# EAGLE board AES_HWR1_M2018 (EAGLE 8.6.1), part 1 of 2
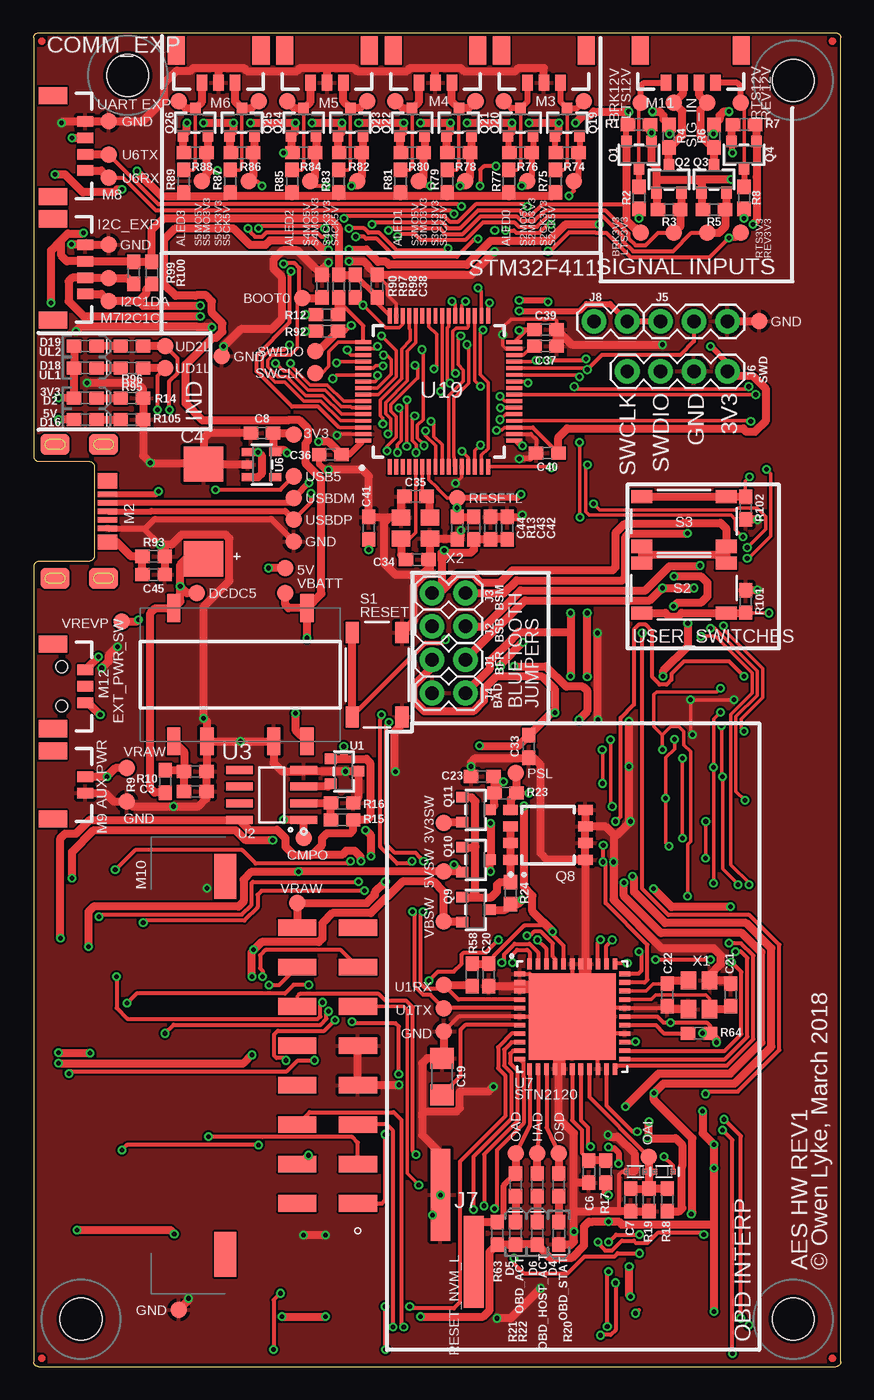
[diagram p0: board, top side]
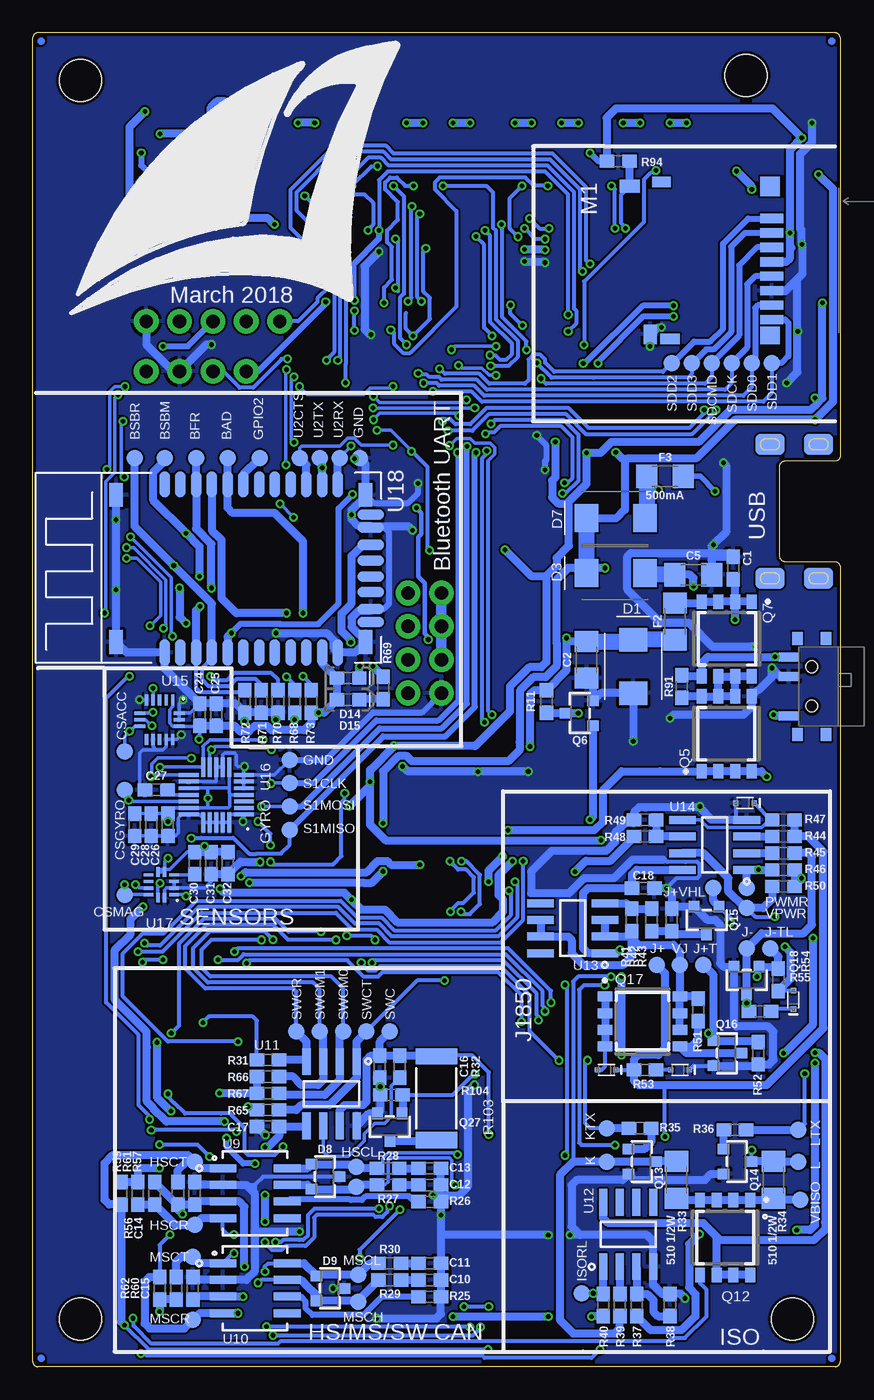
[diagram p1: board, bottom side, seen from below]

Size 61.47 x 101.6 mm. Coordinates in mm from the lower left corner, seen from the top.
Outline: 0.38,0 61.09,0 arc90 61.47,0.38 61.47,101.22 arc90 61.09,101.6 0.38,101.6 arc90 0,101.22 0,69.37 arc90 0.41,68.96 4.2,68.96 arc-90 4.63,68.56 4.63,61.77 arc-90 4.17,61.34 0.44,61.34 arc90 0,60.9 0,0.38 arc90 0.38,0
Copper layers (1*16): Top 0.035mm / dielectric 1.5mm / Bottom 0.035mm
Design rules "SeeedStudio_2layer_DRU_no_angle_20140221": minimum track width 6mil, minimum drill 12mil, track to track 6mil, track to pad 6mil, pad to pad 6mil, via to via 6mil, smd to smd 0mil, copper to edge 10mil, drill to drill 10mil, minimum pad ring 10mil, minimum via ring 6mil, stop-mask expansion 2mil, vias tented up to drill 100mil, thermal gap 10mil
Holes 3.2 mm at 3.62,3.62 57.85,3.62 57.85,97.98 7.17,98.36

## Footprints (pad centres in the part's own frame; a part is rotated, then mirrored left to right if it is on the bottom)
0603 = smd 1.1 x 1: 1 -0.85,0; 2 0.85,0
1206 = smd 1.6 x 1.8: 1 -1.4,0; 2 1.4,0
2917_P = smd 2.7 x 3: PIN_1_- -3.6,0; PIN_2_+ 3.6,0
DO-214AA = smd 1.778 x 2.159: A 2.032,0; C -2.032,0
0603-POLAR = smd 1.1 x 1: + -0.85,0; - 0.85,0
DO-214BA = smd 1.778 x 2.159: A 2.286,0; C -2.159,0
SOT23-3 = smd 0.8 x 0.9: 1 -0.95,-1; 2 0.95,-1; 3 0,1.1
SOD-523 = smd 0.4 x 0.4: A -0.7,0; C 0.7,0
1X02 = drill 1.016 pad 1.88: 1 0,0; 2 2.54,0
1X03 = drill 1.016 pad 1.88: 1 0,0; 2 2.54,0; 3 5.08,0
1X04 = drill 1.016 pad 1.88: 1 0,0; 2 2.54,0; 3 5.08,0; 4 7.62,0
SMD_HEADER_0.1IN_2POS = smd 1.5 x 7: P$1 -1.27,2.54; P$2 1.27,-2.54
SD_AMPHENOL_PUSH_PULL = smd 1.45 x 1: CD_SW1 -1.125,8.35 | smd 1 x 1.55: CD_SW2 10.15,9.925 | smd 1.3 x 1.5: NC_MOUNT1 -1.2,-0.75 | smd 1.5 x 1.5: NC_MOUNT2 10.15,-0.75 | smd 0.8 x 1.5: NC_MOUNT3 -1.475,6.85 | smd 0.8 x 1.4: NC_MOUNT4 10.475,7.5 | smd 0.7 x 1.75: P$1 7.7,-0.875; P$2 6.6,-0.875; P$3 5.5,-0.875; P$4 4.4,-0.875; P$5 3.3,-0.875; P$6 2.2,-0.875; P$7 1.1,-0.875; P$8 0,-0.875
MICROUSB = smd 0.4 x 1.5: 1 -1.3,0.75; 2 -0.65,0.75; 3 0,0.75; 4 0.65,0.75; 5 1.3,0.75 | smd 1.15 x 1.5: MOUNT0T -2.325,0.75; MOUNT5T 2.325,0.75 | smd 1.6 x 2.2 bottom: MOUNT1B -5.1,0.45; MOUNT2B -5.1,-3.25; MOUNT3B 5.1,-3.25; MOUNT4B 5.1,0.45 | smd 1.6 x 2.2: MOUNT1T -5.1,0.45; MOUNT2T -5.1,-3.25; MOUNT3T 5.1,-3.25; MOUNT4T 5.1,0.45
3_PIN_LOCK = smd 1.3 x 2.15: MOUNT0 -3.225,2.46; MOUNT1 3.225,2.46 | smd 0.8 x 1.2: P$1 -1.25,0; P$2 0,0; P$3 1.25,0
4_PIN_LOCK = smd 1.3 x 2.15: MOUNT0 -4.475,2.46; MOUNT1 3.225,2.46 | smd 0.8 x 1.2: P$1 -2.5,0; P$2 -1.25,0; P$3 0,0; P$4 1.25,0
2_PIN_LOCK = smd 1.3 x 2.15: MOUNT0 -1.975,2.46; MOUNT1 3.225,2.46 | smd 0.8 x 1.2: P$2 0,0; P$3 1.25,0
OBD_16_SMD = smd 1.27 x 2.92: 1 24.895,10.095; 2 21.895,10.095; 3 18.895,10.095; 4 15.895,10.095; 5 12.895,10.095; 6 9.895,10.095; 7 6.895,10.095; 8 3.895,10.095; 9 24.895,5.475; 10 21.895,5.475; 11 18.895,5.475; 12 15.895,5.475; 13 12.895,5.475; 14 9.895,5.475; 15 6.895,5.475; 16 3.895,5.475 | smd 3.43 x 1.65: MOUNT0 0,-0.005; MOUNT1 28.79,-0.005
SOT23-3@1 = smd 0.8 x 0.9: 1 -0.95,-1; 2 0.95,-1; 3 0,1.1
SOP-8 = smd 0.76 x 1.1: 1 0,-5.7; 2 1.27,-5.7; 3 2.54,-5.7; 4 3.81,-5.7; 5 3.81,0; 6 2.54,0; 7 1.27,0; 8 0,0
SOP-8@1 = smd 0.76 x 1.1: 1 0,0; 2 1.27,0; 3 2.54,0; 4 3.81,0; 5 3.81,-5.7; 6 2.54,-5.7; 7 1.27,-5.7; 8 0,-5.7
2512 = smd 1.245 x 3.175: P$1 -3.188,0; P$2 3.188,0
PTS525 = smd 1.6 x 1: P$1 -3.2,1.9; P$2 3.2,1.9; P$3 -3.2,-1.9; P$4 3.2,-1.9
SPARKFUNSWITCH = smd 0.7 x 1.5: C1 -2.25,1.75; C2 2.25,1.75; COM 0.75,1.75 | smd 1 x 0.8: M0 -3.65,1.1; M1 -3.65,-1.1; M2 3.65,-1.1; M3 3.65,1.1 | hole 0.9: -1.5,0; 1.5,0
PAD.03X.05 = smd 1.27 x 1.27: P$1 0,0
SOIC-8 = smd 2.03 x 0.61: 1 0,0.01; 2 0,-1.26; 3 0,-2.53; 4 0,-3.8; 5 4.9,-3.8; 6 4.9,-2.53; 7 4.9,-1.26; 8 4.9,0.01
CUI-5 = smd 1 x 2.1: 1 -5.08,0; 5 5.08,0; 6 5.08,10.16; 7 2.54,10.16; 9 -2.54,10.16; 10 -5.08,10.16
SOT23-5 = smd 0.6 x 0.9: 1 0.95,1.1; 2 0,1.1; 3 -0.95,1.1; 4 -0.95,-1; 5 0.95,-1
QFN-44 = smd 0.85 x 0.35: P$1 -4,3.25; P$2 -4,2.6; P$3 -4,1.95; P$4 -4,1.3; P$5 -4,0.65; P$6 -4,0; P$7 -4,-0.65; P$8 -4,-1.3; P$9 -4,-1.95; P$10 -4,-2.6; P$11 -4,-3.25; P$23 4,-3.25; P$24 4,-2.6; P$25 4,-1.95; P$26 4,-1.3; P$27 4,-0.65; P$28 4,0; P$29 4,0.65; P$30 4,1.3; P$31 4,1.95; P$32 4,2.6; P$33 4,3.25 | smd 0.35 x 0.85: P$12 -3.25,-4; P$13 -2.6,-4; P$14 -1.95,-4; P$15 -1.3,-4; P$16 -0.65,-4; P$17 0,-4; P$18 0.65,-4; P$19 1.3,-4; P$20 1.95,-4; P$21 2.6,-4; P$22 3.25,-4; P$34 3.25,4; P$35 2.6,4; P$36 1.95,4; P$37 1.3,4; P$38 0.65,4; P$39 0,4; P$40 -0.65,4; P$41 -1.3,4; P$42 -1.95,4; P$43 -2.6,4; P$44 -3.25,4 | smd 6.6 x 6.6: P$45 0,0
SOIC-8@1 = smd 2.03 x 0.61: 1 0,0.01; 2 0,-1.26; 3 0,-2.53; 4 0,-3.8; 5 4.9,-3.8; 6 4.9,-2.53; 7 4.9,-1.26; 8 4.9,0.01
LGA-16 = smd 0.85 x 0.25: P$1 -1.5,1; P$2 -1.5,0.5; P$3 -1.5,0; P$4 -1.5,-0.5; P$5 -1.5,-1; P$9 1.5,-1; P$10 1.5,-0.5; P$11 1.5,0; P$12 1.5,0.5; P$13 1.5,1 | smd 0.25 x 0.85: P$6 -0.5,-1.5; P$7 0,-1.5; P$8 0.5,-1.5; P$14 0.5,1.5; P$15 0,1.5; P$16 -0.5,1.5
QFN-24 = smd 1.5 x 0.3: P$1 -2.1,1.5; P$2 -2.1,1; P$3 -2.1,0.5; P$4 -2.1,0; P$5 -2.1,-0.5; P$6 -2.1,-1; P$7 -2.1,-1.5; P$13 2.1,-1.5; P$14 2.1,-1; P$15 2.1,-0.5; P$16 2.1,0; P$17 2.1,0.5; P$18 2.1,1; P$19 2.1,1.5 | smd 0.3 x 1.5: P$8 -1,-2.1; P$9 -0.5,-2.1; P$10 0,-2.1; P$11 0.5,-2.1; P$12 1,-2.1; P$20 1,2.1; P$21 0.5,2.1; P$22 0,2.1; P$23 -0.5,2.1; P$24 -1,2.1
VFLGA-12 = smd 0.75 x 0.25: P$1 -0.975,0.75; P$2 -0.975,0.25; P$3 -0.975,-0.25; P$4 -0.975,-0.75; P$7 0.975,-0.75; P$8 0.975,-0.25; P$9 0.975,0.25; P$10 0.975,0.75 | smd 0.25 x 0.75: P$5 -0.25,-0.975; P$6 0.25,-0.975; P$11 0.25,0.975; P$12 -0.25,0.975
RN42 = smd 2 x 0.8: P$1 0.3,16; P$2 0.3,14.8; P$3 0.3,13.6; P$4 0.3,12.4; P$5 0.3,11.2; P$6 0.3,10; P$7 0.3,8.8; P$8 0.3,7.6; P$9 0.3,6.4; P$10 0.3,5.2; P$11 0.3,4; P$12 0.3,2.8; P$13 13.1,2.8; P$14 13.1,4; P$15 13.1,5.2; P$16 13.1,6.4; P$17 13.1,7.6; P$18 13.1,8.8; P$19 13.1,10; P$20 13.1,11.2; P$21 13.1,12.4; P$22 13.1,13.6; P$23 13.1,14.8; P$24 13.1,16 | smd 0.8 x 2: P$28 9.8,0.3; P$29 3.6,0.3; P$30 10.8,0.3; P$31 8.5,0.3; P$32 7.3,0.3; P$33 6.1,0.3; P$34 4.9,0.3; P$35 2.6,0.3 | smd 1.8 x 1: SHEILD1 1.1,0.7; SHEILD2 12.3,0.7; SHEILD3 1.1,19.7; SHEILD4 12.3,19.7
LQFP-64 = smd 0.3 x 1.2: P$1 -3.75,-5.75; P$2 -3.25,-5.75; P$3 -2.75,-5.75; P$4 -2.25,-5.75; P$5 -1.75,-5.75; P$6 -1.25,-5.75; P$7 -0.75,-5.75; P$8 -0.25,-5.75; P$9 0.25,-5.75; P$10 0.75,-5.75; P$11 1.25,-5.75; P$12 1.75,-5.75; P$13 2.25,-5.75; P$14 2.75,-5.75; P$15 3.25,-5.75; P$16 3.75,-5.75; P$33 3.75,5.75; P$34 3.25,5.75; P$35 2.75,5.75; P$36 2.25,5.75; P$37 1.75,5.75; P$38 1.25,5.75; P$39 0.75,5.75; P$40 0.25,5.75; P$41 -0.25,5.75; P$42 -0.75,5.75; P$43 -1.25,5.75; P$44 -1.75,5.75; P$45 -2.25,5.75; P$46 -2.75,5.75; P$47 -3.25,5.75; P$48 -3.75,5.75 | smd 1.2 x 0.3: P$17 5.75,-3.75; P$18 5.75,-3.25; P$19 5.75,-2.75; P$20 5.75,-2.25; P$21 5.75,-1.75; P$22 5.75,-1.25; P$23 5.75,-0.75; P$24 5.75,-0.25; P$25 5.75,0.25; P$26 5.75,0.75; P$27 5.75,1.25; P$28 5.75,1.75; P$29 5.75,2.25; P$30 5.75,2.75; P$31 5.75,3.25; P$32 5.75,3.75; P$49 -5.75,3.75; P$50 -5.75,3.25; P$51 -5.75,2.75; P$52 -5.75,2.25; P$53 -5.75,1.75; P$54 -5.75,1.25; P$55 -5.75,0.75; P$56 -5.75,0.25; P$57 -5.75,-0.25; P$58 -5.75,-0.75; P$59 -5.75,-1.25; P$60 -5.75,-1.75; P$61 -5.75,-2.25; P$62 -5.75,-2.75; P$63 -5.75,-3.25; P$64 -5.75,-3.75
FA-238 = smd 1.4 x 1.2: P$1 -1.1,-0.8; P$2 1.1,-0.8; P$3 1.1,0.8; P$4 -1.1,0.8

## Placement (x,y rotation side)
C1  0.1uF  [0603]  8.13,60.83 90 bottom
C2  10uF  [1206]  19.3,53.85 270 bottom
C3  560pF  [0603]  12.32,43.81 0 top
C4  220uF  [2917_P]  12.95,65.15 270 top
C5  22uF  [1206]  11.18,60.33 0 bottom
C6  1uF  [0603]  42.29,14.86 270 top
C7  0.1uF  [0603]  45.47,12.7 90 top
C8  1uF  [0603]  17.4,71.12 180 top
C10  560pF  [0603]  31.24,6.6 180 bottom
C11  560pF  [0603]  31.24,7.87 180 bottom
C12  560pF  [0603]  31.24,13.84 180 bottom
C13  560pF  [0603]  31.24,15.11 180 bottom
C14  1uF  [0603]  49.15,13.21 90 bottom
C15  1uF  [0603]  49.28,5.97 90 bottom
C16  150pF  [0603]  35.05,22.86 90 bottom
C17  4.7uF, 25V  [0603]  43.56,18.29 180 bottom
C18  0.1uF  [0603]  14.99,36.45 180 bottom
C19  10uF  [1206]  31.11,22.1 270 top
C20  1uF  [0603]  34.67,29.84 90 top
C21  30pF  [0603]  53.09,28.32 270 top
C22  30pF  [0603]  48.26,28.32 270 top
C23  10uF  [0603]  34.16,44.96 180 top
C24  10uF  [0603]  48.77,49.66 90 bottom
C25  0.1uF  [0603]  47.5,49.66 270 bottom
C26  0.1uF  [0603]  51.18,41.27 90 bottom
C27  0.1uF  [0603]  52.07,43.94 0 bottom
C28  1uF  [0603]  52.45,41.27 270 bottom
C29  0.1uF  [0603]  53.72,41.27 270 bottom
C30  0.1uF  [0603]  49.15,38.35 270 bottom
C31  1uF  [0603]  47.88,38.35 90 bottom
C32  0.1uF  [0603]  46.61,38.35 90 bottom
C33  1uF  [0603]  37.72,47.24 90 top
C34  10pF  [0603]  29.21,61.47 180 top
C35  10pF  [0603]  29.08,66.29 0 top
C36  0.1uF  [0603]  22.61,69.47 180 top
C37  4.7uF  [0603]  38.99,77.72 0 top
C38  0.1uF  [0603]  26.16,82.3 90 top
C39  0.1uF  [0603]  38.99,78.99 0 top
C40  0.1uF  [0603]  39.12,69.6 180 top
C41  0.1uF  [0603]  25.53,63.88 90 top
C42  0.1uF  [0603]  36.07,63.88 90 top
C43  0.1uF  [0603]  34.8,63.88 90 top
C44  0.1uF  [0603]  32.26,63.88 270 top
C45  1uF  [0603]  9.14,60.33 180 top
D1  18V, 5W  [DO-214AA]  15.75,53.34 270 bottom
D2  3V3  [0603-POLAR]  3.94,73.79 0 top
D3  [DO-214BA]  17.14,60.45 0 bottom
D4  OBD_STAT  [0603-POLAR]  40.01,10.16 270 top
D5  OBD_ACT  [0603-POLAR]  36.7,10.16 90 top
D6  OBD_HOST_ACT  [0603-POLAR]  38.35,10.16 90 top
D7  [DO-214BA]  17.14,64.64 0 bottom
D8  [SOT23-3]  39.24,14.48 270 bottom
D9  [SOT23-3]  38.86,5.97 270 bottom
D10  [SOD-523]  7.24,42.93 0 bottom
D11  [SOD-523]  17.78,22.61 0 bottom
D12  [SOD-523]  12.19,22.61 0 bottom
D13  [SOD-523]  3.56,27.94 270 bottom
D14  BLU_CONN  [0603-POLAR]  37.47,52.45 0 bottom
D15  TXRX_ACT  [0603-POLAR]  37.47,50.8 0 bottom
D16  5V  [0603-POLAR]  3.94,72.14 0 top
D18  UL1  [0603-POLAR]  3.94,76.07 0 top
D19  UL2  [0603-POLAR]  3.94,77.72 0 top
D20  [SOD-523]  45.85,14.86 0 top
D21  [SOD-523]  48.01,14.86 0 top
F2  [1206]  12.57,56.77 270 bottom
F3  500mA  [1206]  13.34,67.82 0 bottom
J1  BFR  [1X02]  32.89,53.85 180 top
J2  BSB  [1X02]  32.89,56.39 180 top
J3  BSM  [1X02]  32.89,58.93 180 top
J4  BAD  [1X02]  32.89,51.31 180 top
J5  BOOT1  [1X03]  47.75,79.63 0 top
J6  SWD  [1X04]  45.21,75.82 0 top
J7  RESET_NVM_L  [SMD_HEADER_0.1IN_2POS]  32.26,10.54 0 top
J8  BOOT0  [1X02]  42.67,79.63 0 top
M1  SD CARD  [SD_AMPHENOL_PUSH_PULL]  6.1,79.76 90 bottom
M2  [MICROUSB]  4.89,65.15 270 top
M3  ALED0  [3_PIN_LOCK]  38.86,97.79 0 top
M4  ALED1  [3_PIN_LOCK]  30.61,97.79 0 top
M5  ALED2  [3_PIN_LOCK]  22.35,97.79 0 top
M6  ALED3  [3_PIN_LOCK]  14.1,97.79 0 top
M7  I2C_EXP  [4_PIN_LOCK]  3.94,84.2 90 top
M8  UART EXP  [4_PIN_LOCK]  3.94,93.6 90 top
M9  AUX PWR  [2_PIN_LOCK]  3.94,43.69 90 top
M10  [OBD_16_SMD]  14.61,37.34 270 top
M11  SIG_IN  [4_PIN_LOCK]  50.67,97.79 0 top
M12  EXT_PWR_SW  [3_PIN_LOCK]  3.94,51.82 90 top
Q1  [SOT23-3@1]  46.1,92.33 180 top
Q2  [SOT23-3@1]  48.39,90.42 0 top
Q3  [SOT23-3@1]  51.82,90.42 0 top
Q4  [SOT23-3@1]  54.1,92.33 180 top
Q5  [SOP-8]  10.54,51.05 0 bottom
Q6  [SOT23-3]  19.81,49.78 90 bottom
Q7  [SOP-8]  6.73,52.58 180 bottom
Q8  [SOP-8@1]  36.32,38.61 90 top
Q9  [SOT23-3@1]  33.66,34.8 270 top
Q10  [SOT23-3@1]  33.66,38.61 270 top
Q11  [SOT23-3@1]  33.66,42.42 270 top
Q12  [SOP-8]  6.86,6.99 180 bottom
Q13  [SOT23-3]  15.11,15.62 270 bottom
Q14  [SOT23-3]  7.87,15.62 270 bottom
Q15  [SOT23-3]  10.16,34.04 180 bottom
Q16  [SOT23-3]  8.64,23.88 270 bottom
Q17  [SOP-8]  12.19,28.19 270 bottom
Q18  [SOT23-3]  7.11,29.46 180 bottom
Q19  [SOT23-3]  40.64,94.74 0 top
Q20  [SOT23-3]  37.08,94.74 0 top
Q21  [SOT23-3]  32.38,94.74 0 top
Q22  [SOT23-3]  28.83,94.74 0 top
Q23  [SOT23-3]  24.13,94.74 0 top
Q24  [SOT23-3]  20.57,94.74 0 top
Q25  [SOT23-3]  15.88,94.74 0 top
Q26  [SOT23-3]  12.32,94.74 0 top
Q27  [SOT23-3]  34.29,18.29 180 bottom
R1  10k  [0603]  46.1,94.61 0 top
R2  10k  [0603]  46.1,89.03 270 top
R3  10k  [0603]  48.39,88.14 180 top
R4  10k  [0603]  48.39,93.73 90 top
R5  10k  [0603]  51.82,88.14 180 top
R6  10k  [0603]  51.82,93.73 90 top
R7  10k  [0603]  54.1,94.61 0 top
R8  10k  [0603]  54.1,89.03 270 top
R9  TRMD  [0603]  10.03,44.58 270 top
R10  TRMU  [0603]  12.32,45.34 180 top
R11  10k  [0603]  22.35,50.67 90 bottom
R12  22  [0603]  22.35,80.14 180 top
R13  10k  [0603]  33.53,63.88 270 top
R14  300  [0603]  7.49,73.79 180 top
R15  [0603]  23.5,41.66 0 top
R16  [0603]  23.5,42.93 180 top
R17  10  [0603]  43.56,14.86 90 top
R18  62k  [0603]  48.26,12.7 270 top
R19  10k  [0603]  46.86,12.7 90 top
R20  330  [0603]  40.01,13.84 90 top
R21  330  [0603]  36.7,13.84 270 top
R22  330  [0603]  38.35,13.84 270 top
R23  100k  [0603]  35.94,43.69 180 top
R24  100k  [0603]  36.32,36.07 270 top
R25  4k7  [0603]  31.24,5.33 180 bottom
R26  4k7  [0603]  31.24,12.57 180 bottom
R27  100  [0603]  34.42,13.84 180 bottom
R28  100  [0603]  34.42,15.11 180 bottom
R29  100  [0603]  34.29,6.6 180 bottom
R30  100  [0603]  34.29,7.87 180 bottom
R31  1k  [0603]  43.56,23.37 180 bottom
R32  6k49  [0603]  33.53,22.86 90 bottom
R33  510 1/2W  [1206]  12.45,14.22 270 bottom
R34  510 1/2W  [1206]  5.08,14.22 270 bottom
R35  1k  [0603]  15.24,18.16 0 bottom
R36  1k  [0603]  8,18.03 180 bottom
R37  10k  [0603]  15.49,4.7 270 bottom
R38  10k  [0603]  12.95,4.7 270 bottom
R39  10k  [0603]  16.76,4.7 90 bottom
R40  10k  [0603]  18.03,4.7 270 bottom
R41  240  [0603]  15.88,34.04 270 bottom
R42  866  [0603]  14.35,34.04 90 bottom
R43  374  [0603]  12.83,34.04 270 bottom
R44  10k  [0603]  4.32,40.39 180 bottom
R45  10k  [0603]  4.32,39.12 180 bottom
R46  10k  [0603]  4.32,37.85 0 bottom
R47  10k  [0603]  4.32,41.66 0 bottom
R48  2k7  [0603]  14.86,40.39 180 bottom
R49  10k  [0603]  14.86,41.66 0 bottom
R50  10k  [0603]  4.32,36.58 0 bottom
R51  10k  [0603]  10.79,27.18 90 bottom
R52  10k  [0603]  6.22,23.88 90 bottom
R53  10k  [0603]  14.86,22.61 0 bottom
R54  10k  [0603]  4.7,29.46 270 bottom
R55  10k  [0603]  6.1,27.05 0 bottom
R56  1k  [0603]  50.42,13.21 270 bottom
R57  1k5  [0603]  52.2,13.21 90 bottom
R58  1k  [0603]  33.4,29.84 90 top
R59  100k  [0603]  54.74,13.21 90 bottom
R60  100k  [0603]  50.55,5.97 270 bottom
R61  100k  [0603]  53.47,13.21 90 bottom
R62  100k  [0603]  51.82,5.97 270 bottom
R63  100k  [0603]  35.31,10.16 90 top
R64  100k  [0603]  50.67,25.4 0 top
R65  1k5  [0603]  43.56,19.56 180 bottom
R66  10k  [0603]  43.56,22.1 180 bottom
R67  10k  [0603]  43.56,20.83 180 bottom
R68  330  [0603]  41.53,50.67 270 bottom
R69  330  [0603]  34.8,51.69 270 bottom
R70  10k  [0603]  42.8,50.67 90 bottom
R71  10k  [0603]  44.07,50.67 90 bottom
R72  10k  [0603]  45.34,50.67 90 bottom
R73  10k  [0603]  40.26,50.67 90 bottom
R74  10k  [0603]  40.64,92.46 180 top
R75  10k  [0603]  39.75,90.3 270 top
R76  10k  [0603]  37.08,92.46 180 top
R77  10k  [0603]  36.2,90.3 270 top
R78  10k  [0603]  32.38,92.46 180 top
R79  10k  [0603]  31.5,90.3 270 top
R80  10k  [0603]  28.83,92.46 180 top
R81  10k  [0603]  27.94,90.3 270 top
R82  10k  [0603]  24.13,92.46 180 top
R83  10k  [0603]  23.24,90.3 270 top
R84  10k  [0603]  20.57,92.46 180 top
R85  10k  [0603]  19.68,90.3 270 top
R86  10k  [0603]  15.88,92.46 180 top
R87  10k  [0603]  14.99,90.3 270 top
R88  10k  [0603]  12.32,92.46 180 top
R89  10k  [0603]  11.43,90.3 270 top
R90  10k  [0603]  21.97,82.3 270 top
R91  10k  [0603]  12.06,51.82 270 bottom
R92  22  [0603]  22.35,78.87 180 top
R93  1M  [0603]  9.14,61.72 0 top
R94  10k  [0603]  16.89,91.82 0 bottom
R95  330  [0603]  7.49,76.07 180 top
R96  330  [0603]  7.49,77.72 180 top
R97  2k2  [0603]  23.24,82.3 90 top
R98  2k2  [0603]  24.51,82.3 90 top
R99  4k7  [0603]  7.62,83.31 270 top
R100  4k7  [0603]  9.02,83.31 270 top
R101  10k  [0603]  54.23,58.29 270 top
R102  10k  [0603]  54.23,65.41 90 top
R103  130 2W  [2512]  30.73,20.45 90 bottom
R104  10k  [0603]  34.16,20.7 0 bottom
R105  300  [0603]  7.49,72.14 180 top
S1  RESET  [PTS525]  26.16,52.7 270 top
S2  US2  [PTS525]  49.53,59.31 180 top
S3  US1  [PTS525]  49.53,64.39 0 top
S4  [SPARKFUNSWITCH]  2.16,51.82 90 bottom
TP1  GPIO2  [PAD.03X.05]  44.2,69.22 90 bottom
TP2  REV3V3  [PAD.03X.05]  53.85,86.36 180 top
TP3  RTS3V3  [PAD.03X.05]  51.31,86.36 180 top
TP4  LTS3V3  [PAD.03X.05]  48.77,86.36 180 top
TP5  BRK3V3  [PAD.03X.05]  46.23,86.36 180 top
TP6  REV12V  [PAD.03X.05]  53.85,96.27 180 top
TP7  RTS12V  [PAD.03X.05]  51.31,96.27 180 top
TP8  LTS12V  [PAD.03X.05]  48.77,96.27 180 top
TP9  BRK12V  [PAD.03X.05]  46.23,96.27 180 top
TP10  VRAW  [PAD.03X.05]  7.11,45.59 0 top
TP11  VREVP  [PAD.03X.05]  6.73,56.77 0 top
TP12  VBATT  [PAD.03X.05]  19.18,58.93 0 top
TP13  5V  [PAD.03X.05]  19.18,60.83 0 top
TP14  3V3  [PAD.03X.05]  19.81,70.99 0 top
TP15  GND  [PAD.03X.05]  7.11,43.05 0 top
TP16  S2CK3V3  [PAD.03X.05]  41.15,90.3 0 top
TP17  S2CK5V  [PAD.03X.05]  41.91,96.39 0 top
TP18  S2MO3V3  [PAD.03X.05]  37.59,90.3 0 top
TP19  S2MO5V  [PAD.03X.05]  35.81,96.39 0 top
TP20  S3CK3V3  [PAD.03X.05]  32.89,90.3 0 top
TP21  S3CK5V  [PAD.03X.05]  33.66,96.39 0 top
TP22  S3MO3V3  [PAD.03X.05]  29.34,90.3 0 top
TP23  S3MO5V  [PAD.03X.05]  27.56,96.39 0 top
TP24  S4CK3V3  [PAD.03X.05]  24.64,90.3 0 top
TP25  S4CK5V  [PAD.03X.05]  25.4,96.39 0 top
TP26  S4MO3V3  [PAD.03X.05]  21.08,90.3 0 top
TP27  S4MO5V  [PAD.03X.05]  19.3,96.39 0 top
TP28  S5CK3V3  [PAD.03X.05]  16.38,90.3 0 top
TP29  S5CK5V  [PAD.03X.05]  17.14,96.39 0 top
TP30  S5MO3V3  [PAD.03X.05]  12.83,90.3 0 top
TP31  S5MO5V  [PAD.03X.05]  11.05,96.39 0 top
TP32  S1MISO  [PAD.03X.05]  41.91,40.89 270 bottom
TP33  S1MOSI  [PAD.03X.05]  41.91,42.67 270 bottom
TP34  S1CLK  [PAD.03X.05]  41.91,44.45 270 bottom
TP35  GND  [PAD.03X.05]  41.91,46.23 180 bottom
TP36  CSMAG  [PAD.03X.05]  54.48,35.94 180 bottom
TP37  CSACC  [PAD.03X.05]  54.48,46.86 270 bottom
TP38  CSGYRO  [PAD.03X.05]  54.48,43.94 180 bottom
TP39  U2RX  [PAD.03X.05]  38.1,69.22 90 bottom
TP40  U2TX  [PAD.03X.05]  39.62,69.22 90 bottom
TP41  U2CTS  [PAD.03X.05]  41.15,69.22 90 bottom
TP42  U1RX  [PAD.03X.05]  31.24,29.08 0 top
TP43  U1TX  [PAD.03X.05]  31.24,27.3 0 top
TP44  GND  [PAD.03X.05]  31.24,25.53 0 top
TP45  U6RX  [PAD.03X.05]  5.71,90.55 90 top
TP46  U6TX  [PAD.03X.05]  5.71,92.33 90 top
TP47  I2C1DA  [PAD.03X.05]  5.71,82.93 90 top
TP48  I2C1CL  [PAD.03X.05]  5.71,81.15 90 top
TP49  BFR  [PAD.03X.05]  49.02,69.22 90 bottom
TP50  BSBR  [PAD.03X.05]  53.72,69.22 90 bottom
TP51  BSBM  [PAD.03X.05]  51.44,69.22 90 bottom
TP52  BAD  [PAD.03X.05]  46.61,69.22 90 bottom
TP53  GND  [PAD.03X.05]  36.58,69.22 90 bottom
TP54  GND  [PAD.03X.05]  11.05,4.32 0 top
TP55  SWCLK  [PAD.03X.05]  21.46,75.69 0 top
TP56  SWDIO  [PAD.03X.05]  21.46,77.34 0 top
TP57  RESETL  [PAD.03X.05]  32.26,66.17 0 top
TP58  BOOT0  [PAD.03X.05]  20.45,81.41 180 top
TP59  UD1L  [PAD.03X.05]  10.03,76.07 180 top
TP60  UD2L  [PAD.03X.05]  10.03,77.72 180 top
TP61  USBDP  [PAD.03X.05]  19.81,64.52 0 top
TP62  USBDM  [PAD.03X.05]  19.81,66.17 0 top
TP63  SDD0  [PAD.03X.05]  6.73,76.45 90 bottom
TP64  SDD1  [PAD.03X.05]  5.21,76.45 90 bottom
TP65  SDD2  [PAD.03X.05]  12.83,76.45 90 bottom
TP66  SDD3  [PAD.03X.05]  11.3,76.45 90 bottom
TP67  SDCK  [PAD.03X.05]  8.26,76.45 90 bottom
TP68  SDCMD  [PAD.03X.05]  9.78,76.45 90 bottom
TP70  CMPO  [PAD.03X.05]  20.57,40.26 0 top
TP71  VRAW  [PAD.03X.05]  20.07,35.31 0 top
TP72  L  [PAD.03X.05]  3.17,15.62 270 bottom
TP73  HSCL  [PAD.03X.05]  36.83,15.24 0 bottom
TP74  MSCL  [PAD.03X.05]  36.7,6.99 0 bottom
TP75  J-  [PAD.03X.05]  7.11,31.88 270 bottom
TP76  K  [PAD.03X.05]  17.78,15.62 270 bottom
TP77  HSCH  [PAD.03X.05]  36.83,13.72 0 bottom
TP78  GND  [PAD.03X.05]  19.81,62.87 0 top
TP79  KTX  [PAD.03X.05]  17.78,18.16 270 bottom
TP80  MSCH  [PAD.03X.05]  36.7,4.95 0 bottom
TP81  J+  [PAD.03X.05]  13.97,30.61 270 bottom
TP82  SWC  [PAD.03X.05]  34.29,25.53 270 bottom
TP83  LTX  [PAD.03X.05]  3.17,18.03 270 bottom
TP84  VBISO  [PAD.03X.05]  3.05,12.7 270 bottom
TP85  ISORL  [PAD.03X.05]  19.68,5.59 90 bottom
TP86  HSCT  [PAD.03X.05]  49.15,15.62 0 bottom
TP87  HSCR  [PAD.03X.05]  49.15,10.79 0 bottom
TP88  SWCT  [PAD.03X.05]  36.07,25.53 270 bottom
TP89  SWCR  [PAD.03X.05]  41.4,25.53 270 bottom
TP90  MSCT  [PAD.03X.05]  49.28,8.38 0 bottom
TP91  MSCR  [PAD.03X.05]  49.28,3.56 0 bottom
TP92  SWCM0  [PAD.03X.05]  37.85,25.53 270 bottom
TP93  SWCM1  [PAD.03X.05]  39.62,25.53 270 bottom
TP94  VBSW  [PAD.03X.05]  31.24,33.91 90 top
TP95  5VSW  [PAD.03X.05]  31.24,37.72 90 top
TP96  3V3SW  [PAD.03X.05]  31.24,41.4 90 top
TP97  PSL  [PAD.03X.05]  36.7,45.21 90 top
TP98  OSD  [PAD.03X.05]  40.01,16.26 270 top
TP99  HAD  [PAD.03X.05]  38.35,16.26 270 top
TP100  OAD  [PAD.03X.05]  36.7,16.26 270 top
TP101  OAI  [PAD.03X.05]  46.86,16 270 top
TP102  J-TL  [PAD.03X.05]  5.33,31.88 270 bottom
TP103  J+T  [PAD.03X.05]  10.41,30.61 270 bottom
TP104  VJ  [PAD.03X.05]  12.19,30.61 270 bottom
TP105  VPWR  [PAD.03X.05]  7.11,34.92 180 bottom
TP106  PWMR  [PAD.03X.05]  7.11,36.45 180 bottom
TP107  J+VHL  [PAD.03X.05]  9.65,36.45 0 bottom
TP108  DCDC5  [PAD.03X.05]  12.45,58.93 0 top
TP109  USB5  [PAD.03X.05]  19.81,67.82 0 top
TP110  GND  [PAD.03X.05]  5.71,85.47 90 top
TP111  GND  [PAD.03X.05]  5.71,94.87 90 top
TP112  GND  [PAD.03X.05]  55.24,79.63 0 top
TP113  GND  [PAD.03X.05]  14.35,76.96 0 top
U1  [SOT23-3]  23.62,45.34 270 top
U2  [SOIC-8]  20.57,41.66 180 top
U3  DCDC_5V  [CUI-5]  15.75,57.78 180 top
U6  3.3VREG_USB_POWER  [SOT23-5]  17.4,68.71 90 top
U7  STN2120  [QFN-44]  41.02,26.67 0 top
U9  [SOIC-8@1]  46.99,15.11 0 bottom
U10  [SOIC-8@1]  46.99,7.87 0 bottom
U11  [SOIC-8]  36.83,23.24 270 bottom
U12  [SOIC-8]  18.03,7.62 90 bottom
U13  [SOIC-8]  17.91,31.5 180 bottom
U14  [SOIC-8]  7.11,37.85 180 bottom
U15  ACC  [LGA-16]  51.82,49.28 270 bottom
U16  GYRO  [QFN-24]  47.5,43.56 180 bottom
U17  MAG  [VFLGA-12]  51.69,36.7 180 bottom
U18  Bluetooth UART  [RN42]  35.43,54.1 90 bottom
U19  STM32F411  [LQFP-64]  30.86,74.3 0 top
X1  [FA-238]  50.67,28.32 90 top
X2  16MHz  [FA-238]  29.08,63.88 0 top

## Library data of the parts
C1-C8 C10-C45 D1 D3 D7-D13 D20 D21 F2 F3 J1-J8 M1-M12 Q1-Q27 R1-R105 S1-S4 TP1-TP68 TP70-TP113 U1-U3 U6 U7 U9-U19 X1 X2 = AES
D2 D4 D14 D16 D18 D19 = AES; COLOR: Blue; IF: 5 mA; M: 40 mcd; VF: 2.9 V
D5 D6 D15 = AES; COLOR: Orange

## Nets
3.3V: C8.1 C20.2 C23.1 C24.1 C25.2 C26.2 C28.1 C29.1 C30.1 C31.2 C32.2 C33.2 C36.1 C38.1 C39.1 C40.1 C41.1 C42.1 C43.1 D2.+ D5.+ D6.+ D14.+ D15.+ D18.+ D19.+ D21.C J1.2 J2.2 J3.2 J5.1 J6.4 J8.2 M1.P$4 M7.P$3 M8.P$3 Q1.1 Q2.1 Q3.1 Q4.1 Q11.3 Q19.1 Q20.1 Q21.1 Q22.1 Q23.1 Q24.1 Q25.1 Q26.1 R1.2 R3.2 R5.2 R7.2 R13.2 R17.1 R23.2 R31.2 R40.2 R46.2 R50.2 R58.2 R59.2 R60.2 R61.2 R62.2 R63.1 R64.2 R73.1 R74.2 R76.2 R78.2 R80.2 R82.2 R84.2 R86.2 R88.2 R94.1 R97.2 R98.2 R99.1 R100.1 S2.P$3 S2.P$4 S3.P$3 S3.P$4 TP14.P$1 U6.5 U7.P$28 U7.P$40 U15.P$1 U15.P$14 U16.P$4 U16.P$8 U16.P$15 U16.P$18 U17.P$5 U17.P$6 U18.P$11 U19.P$13 U19.P$19 U19.P$32 U19.P$48 U19.P$64
3V3_SW: Q11.2 TP96.P$1
5V: D3.C D7.C D16.+ Q10.3 R65.2 R75.2 R77.2 R79.2 R81.2 R83.2 R85.2 R87.2 R89.2 TP13.P$1 U6.1 U6.3
5V_SW: C14.1 C15.1 D13.A Q10.2 R48.2 R54.2 R56.2 R57.2 R66.2 R67.2 TP95.P$1 U9.3 U10.3
5V_USB: D7.A F3.1 TP109.P$1
BLU_AUTO_DISC: J4.1 R73.2 TP52.P$1 U18.P$20
BLU_CONN_STAT_LED: R68.1 U18.P$21
BLU_FACT_RESET: J1.1 R70.2 TP49.P$1 U18.P$22
BLU_SET_BR: J2.1 R71.2 TP50.P$1 U18.P$4
BLU_SET_BT_MAST: J3.1 R72.2 TP51.P$1 U18.P$3
BLU_SPI_CS: U18.P$23
BLU_SPI_MISO: U18.P$24
BLU_SPI_MOSI: U18.P$2
BLU_SPI_SCLK: U18.P$6
BLU_TXRX_ACT_LED: R69.1 U18.P$31
BOOT0: J8.1 R90.2 TP58.P$1 U19.P$60
BRK_3V3: Q1.2 R1.1 TP5.P$1 U19.P$51
BRK_12V: M11.P$1 Q1.3 R2.1 TP9.P$1
COMP_OUT: Q6.1 TP70.P$1 U2.1
DCDC5V: C4.PIN_2_+ C5.1 D3.A R9.2 TP108.P$1 U3.5
GND: C1.2 C2.2 C3.2 C4.PIN_1_- C5.2 C6.2 C7.1 C8.2 C10.1 C11.1 C12.1 C13.1 C14.2 C15.2 C16.1 C17.2 C18.1 C19.1 C20.1 C21.1 C22.2 C23.2 C24.2 C25.1 C26.1 C27.1 C28.2 C29.2 C31.1 C32.1 C33.1 C34.1 C35.1 C36.2 C37.2 C38.2 C39.2 C40.2 C41.2 C42.2 C43.2 C44.2 C45.1 D1.A D4.- D8.3 D9.3 D10.A D12.C D20.A J4.2 J5.3 J6.3 J7.P$1 M1.CD_SW1 M1.P$6 M2.5 M3.P$2 M4.P$2 M5.P$2 M6.P$2 M7.P$4 M8.P$4 M9.P$2 M10.4 M10.5 Q5.5 Q6.2 Q8.5 Q8.6 Q8.7 Q8.8 Q13.2 Q14.2 Q15.2 Q16.2 Q18.2 Q27.2 R10.1 R14.1 R16.1 R19.1 R25.1 R26.1 R38.1 R43.1 R49.1 R52.1 R70.1 R71.1 R72.1 R90.1 R93.2 R101.1 R102.1 R104.1 R105.1 S1.P$1 S1.P$2 S4.COM TP15.P$1 TP35.P$1 TP44.P$1 TP53.P$1 TP54.P$1 TP78.P$1 TP110.P$1 TP111.P$1 TP112.P$1 TP113.P$1 U1.3 U2.4 U3.7 U3.9 U6.2 U7.P$1 U7.P$2 U7.P$3 U7.P$6 U7.P$15 U7.P$16 U7.P$20 U7.P$26 U7.P$29 U7.P$37 U7.P$38 U7.P$39 U7.P$45 U9.2 U10.2 U11.8 U12.4 U14.4 U15.P$5 U15.P$10 U15.P$12 U15.P$13 U15.P$15 U15.P$16 U16.P$1 U16.P$5 U16.P$6 U16.P$7 U16.P$9 U16.P$10 U16.P$14 U16.P$19 U16.P$20 U16.P$21 U16.P$22 U16.P$23 U16.P$24 U17.P$2 U17.P$3 U17.P$12 U18.P$1 U18.P$12 U18.P$28 U18.P$29 U18.SHEILD1 U18.SHEILD2 U18.SHEILD3 U18.SHEILD4 U19.P$12 U19.P$18 U19.P$31 U19.P$47 U19.P$63 X1.P$2 X1.P$4 X2.P$2 X2.P$4
HS_CAN_HI: D8.2 M10.6 R27.2 TP77.P$1 U9.7
HS_CAN_LO: D8.1 M10.14 R28.2 TP73.P$1 U9.8
HS_CAN_RX: R57.1 R61.1 TP87.P$1 U7.P$10 U9.4
HS_CAN_TX: R56.1 R59.1 TP86.P$1 U7.P$8 U9.1
I2C1_SCL: M7.P$1 R100.2 TP48.P$1 U19.P$58
I2C1_SDA: M7.P$2 R99.2 TP47.P$1 U19.P$59
ISO_K_TX_L: R35.1 TP79.P$1 U7.P$43
ISO_L_TX_L: R36.1 TP83.P$1 U7.P$44
ISO_RX_L: R40.1 TP85.P$1 U7.P$21 U12.1
J1850_BUS+: D11.C M10.2 R44.1 R47.2 R53.1 TP81.P$1
J1850_BUS+_TX: Q16.1 R52.2 TP103.P$1 U7.P$24
J1850_BUS+_VH_L: Q15.1 TP107.P$1 U7.P$25
J1850_BUS-: M10.10 Q18.3 R45.1 R55.1 TP75.P$1
J1850_BUS-_TX_L: Q18.1 R54.1 TP102.P$1 U7.P$33
K_LINE: M10.7 Q13.3 R33.1 R39.1 TP76.P$1
L_LINE: M10.15 Q14.3 R34.1 TP72.P$1
LTS_3V3: Q2.2 R3.1 TP4.P$1 U19.P$56
LTS_12V: M11.P$2 Q2.3 R4.1 TP8.P$1
MS_CAN_HI: D9.2 M10.3 R29.2 TP80.P$1 U10.7
MS_CAN_LO: D9.1 M10.11 R30.2 TP74.P$1 U10.8
MS_CAN_RX: R62.1 TP91.P$1 U7.P$11 U10.4
MS_CAN_TX: R60.1 TP90.P$1 U7.P$9 U10.1
N$1: M12.P$3 Q7.5 R91.1 S4.C2
N$2: C3.1 R9.1 R10.2 U3.6
N$3: Q6.3 R11.1 U3.10
N$4: M12.P$1 S4.C1
N$5: C6.1 R17.2 U7.P$17
N$6: J6.1 R12.2
N$7: D5.- R21.2
N$8: D4.+ R20.1
N$9: D6.- R22.2
N$10: C13.2 R28.1
N$11: C12.2 R27.1
N$12: R25.2 U10.6
N$13: C10.2 R29.1
N$14: R26.2 U9.6
N$15: F3.2 M2.1
N$16: Q8.1 Q8.2 Q8.3 Q9.1 Q10.1 Q11.1 R24.1
N$17: C11.2 R30.1
N$18: R37.1 R38.2 U12.3
N$19: R32.1 U11.6
N$20: R39.2 U12.2
N$21: Q13.1 R35.2
N$22: R44.2 U14.3
N$23: Q14.1 R36.2
N$24: R45.2 U14.2
N$25: Q15.3 R42.1 R43.2
N$26: R41.1 R42.2 U13.4
N$27: C19.2 U7.P$7
N$28: D10.C R47.1 U14.5
N$29: D11.A Q17.1 Q17.2 Q17.3 Q17.4
N$30: R48.1 R49.2 U14.6
N$31: Q16.3 Q17.5 R51.1
N$32: D13.C R55.2
N$33: D12.A R53.2
N$34: C30.2 U17.P$4
N$35: D14.- R68.2
N$36: D15.- R69.2
N$37: C21.2 U7.P$30 X1.P$1
N$38: C22.1 U7.P$31 X1.P$3
N$39: C27.2 U16.P$16
N$40: C35.2 U19.P$6 X2.P$3
N$41: TP1.P$1 U18.P$19
N$42: C34.2 U19.P$5 X2.P$1
N$43: D2.- R14.2
N$44: J6.2 R92.2
N$45: D18.- R95.2
N$46: Q27.3 R103.P$1
N$47: D19.- R96.2
N$48: Q5.6 Q5.7 Q5.8 Q7.6 Q7.7 Q7.8 R91.2
N$49: C45.2 M2.MOUNT5T R93.1
N$50: D16.- R105.2
N$69: C37.1 U19.P$30
OBD_ANALOG_IN: C7.2 D20.C D21.A R18.1 R19.2 TP101.P$1 U7.P$19
OBD_HOST_ACT_LED: R22.1 TP99.P$1 U7.P$13
OBD_OBD_ACT_LED: J7.P$2 R21.1 R63.2 TP100.P$1 U7.P$12
OBD_STATUS_LED: R20.2 TP98.P$1 U7.P$14
PWM_RX: R46.1 TP106.P$1 U7.P$23 U14.1
PWR_SAVE_L: Q8.4 Q12.5 R23.1 TP97.P$1 U7.P$32
RESET_L: C44.1 R13.1 S1.P$3 S1.P$4 TP57.P$1 U7.P$18 U18.P$5 U19.P$7
REV_3V3: Q4.2 R7.1 TP2.P$1 U19.P$62
REV_12V: M11.P$4 Q4.3 R8.1 TP6.P$1
RTS_3V3: Q3.2 R5.1 TP3.P$1 U19.P$57
RTS_12V: M11.P$3 Q3.3 R6.1 TP7.P$1
SD_CD_L: M1.CD_SW2 R94.2 U19.P$10
SDIO_CK: M1.P$5 TP67.P$1 U19.P$36
SDIO_CMD: M1.P$3 TP68.P$1 U19.P$54
SDIO_D0: M1.P$7 TP63.P$1 U19.P$39
SDIO_D1: M1.P$8 TP64.P$1 U19.P$40
SDIO_D2: M1.P$1 TP65.P$1 U19.P$42
SDIO_D3: M1.P$2 TP66.P$1 U19.P$52
SLEEP_L: R64.1 U7.P$27
SPI1_CS_ACC: TP37.P$1 U15.P$8 U19.P$35
SPI1_CS_GYRO: TP38.P$1 U16.P$17 U19.P$27
SPI1_CS_MAG: J5.2 TP36.P$1 U17.P$10 U19.P$28
SPI1_MISO: TP32.P$1 U15.P$7 U16.P$13 U17.P$9 U19.P$22
SPI1_MOSI: TP33.P$1 U15.P$6 U16.P$12 U17.P$11 U19.P$23
SPI1_SCK: TP34.P$1 U15.P$4 U16.P$11 U17.P$1 U19.P$21
SPI2_MOSI_3V3: Q20.2 R76.1 TP18.P$1 U19.P$11
SPI2_MOSI_5V: M3.P$1 Q20.3 R77.1 TP19.P$1
SPI2_SCK_3V3: Q19.2 R74.1 TP16.P$1 U19.P$29
SPI2_SCK_5V: M3.P$3 Q19.3 R75.1 TP17.P$1
SPI3_MOSI_3V3: Q22.2 R80.1 TP22.P$1 U19.P$53
SPI3_MOSI_5V: M4.P$1 Q22.3 R81.1 TP23.P$1
SPI3_SCK_3V3: Q21.2 R78.1 TP20.P$1 U19.P$33
SPI3_SCK_5V: M4.P$3 Q21.3 R79.1 TP21.P$1
SPI4_MOSI_3V3: Q24.2 R84.1 TP26.P$1 U19.P$15
SPI4_MOSI_5V: M5.P$1 Q24.3 R85.1 TP27.P$1
SPI4_SCK_3V3: Q23.2 R82.1 TP24.P$1 U19.P$34
SPI4_SCK_5V: M5.P$3 Q23.3 R83.1 TP25.P$1
SPI5_MOSI_3V3: Q26.2 R88.1 TP30.P$1 U19.P$61
SPI5_MOSI_5V: M6.P$1 Q26.3 R89.1 TP31.P$1
SPI5_SCK_3V3: Q25.2 R86.1 TP28.P$1 U19.P$26
SPI5_SCK_5V: M6.P$3 Q25.3 R87.1 TP29.P$1
SW_CAN: C16.2 M10.1 R32.2 R103.P$2 TP82.P$1 U11.7
SW_CAN_LOAD: Q27.1 R104.2 U7.P$34
SW_CAN_MODE0: R67.1 TP92.P$1 U7.P$35 U11.2
SW_CAN_MODE1: R66.1 TP93.P$1 U7.P$36 U11.3
SW_CAN_RX: R31.1 TP89.P$1 U7.P$42 U11.4
SW_CAN_TX: R65.1 TP88.P$1 U7.P$41 U11.1
SWCLK: R12.1 R97.1 TP55.P$1 U19.P$49
SWDIO: R92.1 R98.1 TP56.P$1 U19.P$46
US1: R102.2 S3.P$1 S3.P$2 U19.P$20
US2: R101.2 S2.P$1 S2.P$2 U19.P$24
USART1_RX: R58.1 TP42.P$1 U7.P$4 U19.P$55
USART1_TX: TP43.P$1 U7.P$5 U19.P$50
USART2_CTS: TP41.P$1 U18.P$15 U19.P$14
USART2_RX: TP39.P$1 U18.P$13 U19.P$17
USART2_TX: TP40.P$1 U18.P$14 U19.P$16
USART6_RX: M8.P$1 TP45.P$1 U19.P$38
USART6_TX: M8.P$2 TP46.P$1 U19.P$37
USB_OTG_FS_DM: M2.2 TP62.P$1 U19.P$44
USB_OTG_FS_DP: M2.3 TP61.P$1 U19.P$45
USER_LED1L: R95.1 TP59.P$1 U19.P$8
USER_LED2L: R96.1 TP60.P$1 U19.P$9
V_BACKUP: U19.P$1
V_BATT: C2.1 C17.1 D1.C F2.2 Q9.3 Q12.6 Q12.7 Q12.8 R2.2 R4.2 R6.2 R8.2 R11.2 R15.2 R18.2 R24.2 TP12.P$1 U1.1 U2.8 U3.1 U11.5 U12.8
V_BATT_ISO: Q12.1 Q12.2 Q12.3 Q12.4 R33.2 R34.2 TP84.P$1
V_BATT_RAW: M9.P$3 M10.16 Q5.1 Q5.2 Q5.3 Q5.4 TP10.P$1 TP71.P$1
V_BATT_REVP: C1.1 F2.1 Q7.1 Q7.2 Q7.3 Q7.4 TP11.P$1
V_BATT_SW: C18.2 Q9.2 R37.2 TP94.P$1 U13.1 U14.8
V_COMP_+: U1.2 U2.3
V_COMP_-: R15.1 R16.2 U2.2
V_J1850: Q17.6 Q17.7 Q17.8 R41.2 R51.2 TP104.P$1 U13.2 U13.3 U13.6 U13.7
VPW_RX: R50.1 TP105.P$1 U7.P$22 U14.7

## Tracks (layer width: path | path; a pad name or v marks a point on that pad's centre or on a via)
3.3V  (via drill 0.35)
  Top 0.254: v51.19,41.53 v51.18,41.52 v51.18,38.73 | v48.82,47.8 48.82,47.07 48.13,46.39 v48.13,43.31 48.13,39.91 v48.39,39.65 | U19.P$13 33.11,69.24 v32.62,69.72 | U19.P$19 35.86,71.55 35.64,71.33 v35.25,71.33
  Top 0.305: U7.P$28 47.5,26.67 47.95,26.22 v48.51,26.22 51.25,26.22 51.52,25.95 R64.2 v50.93,25.4 | D21.C 48.71,15.3 v48.01,16 | U7.P$40 40.37,32.05 39.51,32.91 | 39.51,32.91 38.83,33.6 37.38,33.6 35.02,31.23 35.02,31.04 C20.2 | 39.51,32.91 39.51,33.13 v39.53,33.14 | U19.P$48 26.16,80.99 C38.1 | 24.97,70.41 U19.P$64 | U19.P$19 38.02,71.55 C40.1 | U19.P$32 37.56,78.99 C39.1 37.04,78.99 v36.99,78.95
  Top 0.457: Q20.1 36.13,92.56 R76.2 | Q19.1 39.69,92.56 R74.2 | 55.05,94.52 R7.2 | 47.44,91.37 47.44,90.42 Q2.1 | C38.1 26.16,81.5 R98.2 | v19.05,92.46 R84.2 | v47.05,93.98 Q1.1 | C36.1 24.04,69.47 24.97,70.41 | v36.99,80.41 41.58,80.41 42.12,80.95 43.89,80.95 J8.2 J5.1 | J6.4 52.83,76.45 v51.56,77.72
  Top 0.61: 18.25,69.81 C8.1 19.68,71.12 TP14.P$1 | 18.25,69.81 U6.5 | Q11.3 35.09,42.75 R23.2 35.09,44.88 C23.1 35.42,44.55 v35.79,44.55 | R84.2 19.62,92.56 Q24.1 19.94,94.06 v19.94,94.74 v16.51,94.74 | R82.2 23.18,92.56 Q23.1 23.5,94.06 v23.5,94.74 v21.21,94.74 | R86.2 14.93,92.56 Q25.1 15.24,94.06 v15.24,94.74 v12.95,94.74 | R88.2 11.37,92.56 Q26.1 11.68,94.06 v11.68,94.74 | R80.2 27.88,92.56 Q22.1 28.19,94.06 v28.19,94.74 v24.77,94.74 | R78.2 31.43,92.56 Q21.1 31.75,94.06 v31.75,94.74 v29.46,94.74 | R58.2 C20.2 | v51.82,4.19 51.82,10.79 | 51.82,10.79 v51.82,15.11 v51.82,16.91 50.95,17.78 v50.95,19.45 | R17.1 43.56,13.31 v43.79,13.08 | 51.82,10.79 51.77,10.84 44.78,10.84 44.55,11.06 v43.79,11.06 42.62,11.06 42.61,11.05 42.29,11.05 41.93,10.69 41.93,9.23 41,8.3 39.32,8.3 39.05,8.57 39.05,8.62 D6.+ D5.+ R63.1 34.73,8.74 34.73,4.31 34.23,3.81 v29.46,3.81 | v18.92,3.81 v22.23,3.81 | R64.2 52.02,24.91 v52.02,24.7 | v19.3,69.6 19.09,69.81 18.25,69.81 | v39.53,33.14 37.99,34.68 37.99,35.89 37.35,36.53 v37.35,42.71 | v2.94,37.21 2.94,39.22 4.59,40.87 15.37,40.87 16.11,40.13 18.19,40.13 v18.22,40.11 | D19.+ D18.+ D2.+ v1.91,73.79 | R98.2 R97.2 23.24,86.74 22.5,87.48 9.91,87.48 9.02,86.59 R100.1 R99.1 7.58,84.2 M7.P$3 2.54,84.2 2.11,84.63 2.11,85.8 | v33.95,47.29 36.91,47.29 C33.2 39.45,49.82 v39.71,49.82 39.71,51.57 38.72,52.56 36.91,52.56 36.9,52.55 35.22,52.55 34.29,51.63 34.29,50.73 33.47,49.91 29.77,49.91 28.96,50.73 28.96,51.89 30.35,53.28 J1.2 | S3.P$3 46.33,61.85 | 46.33,61.85 S2.P$4 | 52.73,61.85 S3.P$4 52.73,63.86 52.32,64.27 49.48,64.27 49.41,64.21 45.02,64.21 44.31,63.49 44.31,60.89 44.07,60.65 36.46,60.65 35.5,59.69 34.11,59.69 33.47,60.33 32.31,60.33 30.92,58.93 J3.2 31.07,59.64 31.07,61.47
  Top 0.61: 52.73,61.85 S2.P$3 | 46.33,61.85 52.73,61.85 | v2.92,93.6 M8.P$3 | C42.1 C43.1 R13.2 33.53,62.23 33.27,61.98 31.57,61.98 31.07,61.47 | Q20.1 36.45,94.06 v36.45,94.74 v33.02,94.74 | Q19.1 40.01,94.06 v40.01,94.74 v37.72,94.74 | 2.11,85.8 2.63,86.31 3.76,86.31 v3.81,86.36 | v1.34,81.03 1.34,85.03 2.11,85.8 | R3.2 47.44,88.24 Q2.1 47.44,91.37 47.05,91.76 Q1.1 | R5.2 50.87,88.24 Q3.1 50.87,90.1 50.55,90.42 | 55.05,94.52 Q4.1 55.05,90.62 55.06,90.62 55.06,87.29 v54.78,87.01 | R1.2 46.95,94.08 v47.05,93.98 | v41.27,94.74 41.83,95.3 42.36,95.3 42.66,95.59 v45.32,95.59 | 47.44,90.42 50.55,90.42 | v53.12,90.42 50.55,90.42 | C36.1 22.48,70.45 v21.69,70.45 | C41.1 v25.53,62.23 | 31.07,61.47 31.07,61.99 v31.28,62.2 | C40.1 39.97,70.79 40.64,71.46 54.05,71.46 54.28,71.22 54.94,71.22 55.78,72.06 55.78,74.45 54.78,75.44 53.22,75.44 J6.4
  Bottom 0.254: U17.P$5 U17.P$6 51.76,37.86 51.44,37.86 | C30.1 49.7,39.2 51.04,37.86 51.44,37.86 | U16.P$4 46.35,43.56 46.48,43.69 | 46.5,44.07 46.5,43.7 46.48,43.69 | 46.5,44.07 U16.P$8 | 48.13,42.56 U16.P$18 50.74,42.56 C26.2 | 48.13,42.56 46.59,42.56 46.48,42.67 46.48,43.69 | C26.2 C28.1 C29.1 | U15.P$1 50.82,50.28 51.05,50.04 51.05,49.02 50.8,48.77 50.79,48.78 U15.P$14 48.8,48.78 C24.1 48.77,48.13 48.82,48.09 v48.82,47.8 | U16.P$15 48.13,44.07 | 48.13,44.07 46.5,44.07 | 48.13,44.07 v48.13,43.31 48.13,42.56 | C26.2 v51.18,41.53 v51.19,41.53 | v51.18,38.73 51.44,38.48 51.44,37.86 | v48.39,39.65 48.39,39.2 | v32.62,69.72 34.23,71.33 v35.25,71.33
  Bottom 0.305: v51.82,16.91 48.92,16.91 v48.01,16 | v39.53,33.14 42.02,33.14 42.99,34.11 48.45,34.11 50.35,32.21 50.35,25.97 v50.93,25.4 | R31.2 44.41,26.38 44.7,26.67 48.06,26.67 v48.51,26.22 | v39.71,49.82 R73.1 | v31.28,62.2 31.41,62.33 31.41,68.51 v32.62,69.72 | v36.99,78.95 v36.99,80.41
  Bottom 0.457: R94.1 18.41,91.82 v19.05,92.46 | v51.56,77.72 49.66,77.72 J5.1
  Bottom 0.61: R46.2 R50.2 2.94,37.1 v2.94,37.21 | C32.2 C31.2 48.39,39.2 C30.1 | R59.2 R61.2 53.47,14.99 53.34,15.11 v51.82,15.11 | R60.2 R62.2 v51.82,4.19 | v43.79,13.08 v43.79,11.06 | R40.2 18.88,3.85 v18.92,3.81 | v22.23,3.81 v29.46,3.81 | v52.02,24.7 52.02,20.52 v50.95,19.45 | 20.65,65.91 19.3,67.26 v19.3,69.6 18.25,69.6 17.41,70.44 10.77,70.44 8.32,72.9 2.25,72.9 2.23,72.92 2.2,72.92 1.75,73.37 | 20.65,65.91 20.65,62.53 21.59,61.59 21.59,61.02 22.38,60.24 | v37.35,42.71 35.79,44.27 | 35.79,44.27 v35.79,44.55 35.79,45.47 35.75,45.47 33.95,47.27 | v18.22,40.11 18.28,40.05 34.56,40.05 35.79,41.28 35.79,44.27 | 22.38,60.24 22.38,53.66 22.74,53.29 23.67,53.29 25.15,51.81 25.15,49.91 27.79,47.27 33.95,47.27 | 33.95,47.27 v33.95,47.29 | U18.P$11 39.43,53.57 D14.+ D15.+ 39.29,49.82 R73.1 40.26,49.02 40.79,48.49 43.3,48.49 43.62,48.82 44.56,48.82 45.01,48.36 45.66,48.36 46.11,48.81 C25.2 C24.1 | M1.P$4 4.11,84.16 3.81,84.45 3.81,85.34 | 3.68,85.22 3.81,85.34 | 3.81,85.34 v3.81,86.36 3.81,92.71 v2.92,93.6 5.14,95.82 17.08,95.82 17.78,95.12 17.78,91.86 R94.1 | v37.72,94.74 v36.45,94.74 | v33.02,94.74 v31.75,94.74 | v29.46,94.74 v28.19,94.74 | v24.77,94.74 v23.5,94.74 | v21.21,94.74 v19.94,94.74 | v16.51,94.74 v15.24,94.74 | v12.95,94.74 v11.68,94.74 | 1.75,73.37 1.75,73.63 v1.91,73.79 | 1.75,73.37 1.34,73.78 v1.34,81.03 | v47.05,93.98 47.05,94.4 47.92,95.27 47.92,95.92 47.46,96.38 46.81,96.38 46.02,95.59 v45.32,95.59 | v54.78,87.01 54.74,87.01 54.43,86.69 53.78,86.69 53.32,87.15 53.32,87.8 53.34,87.82 53.34,90.21 v53.12,90.42 | v21.69,70.45 21.69,67.74 21.93,67.5 21.93,66.2 21.47,65.75 20.82,65.75 20.65,65.91
  Bottom 0.61: v25.53,62.23 23.53,60.24 22.38,60.24 | v40.01,94.74 v41.27,94.74
  Bottom 0.813: J1.2 J2.2 J3.2
3V3_SW
  Top 0.61: Q11.2 31.31,41.47 TP96.P$1
5V  (via drill 0.35)
  Top 0.61: U6.1 v17.08,69.66 17.4,69.34 17.4,68.07 17.08,67.76 U6.3 | TP13.P$1 v17.91,60.83 | D16.+ v1.91,72.14 | v45.09,19.81 47.6,22.33 53.06,22.33 55.41,24.68 55.41,31.56 53.94,33.04 47.77,33.04 44.95,35.85 v44.95,36.88 | v34.8,37.72 34.76,37.76 Q10.3 34.8,38.65 v34.8,41.4 | R89.2 11.72,89.15 | 14.69,89.15 R87.2 | 11.72,89.15 14.69,89.15 | R75.2 39.46,89.15 36.2,89.15 | 36.2,89.15 31.5,89.15 | 31.5,89.15 27.94,89.15 | 27.94,89.15 23.24,89.15 | 23.24,89.15 19.68,89.15 | 19.68,89.15 14.69,89.15 | R85.2 19.68,89.15 | R83.2 23.24,89.15 | R81.2 27.94,89.15 | R79.2 31.5,89.15 | R77.2 36.2,89.15 | v7.88,91.06 7.88,91.03 9.75,89.15 11.72,89.15 | v6.73,89.66 6.37,89.66 6.17,89.46 3.76,89.46 2.41,90.81 v1.65,90.81
  Bottom 0.61: D3.C 18.92,60.83 v17.91,60.83 20.7,60.83 21.61,59.92 21.61,55.17 21.59,55.15 21.59,53.36 22.42,52.53 23.35,52.53 24.38,51.5 24.38,47.59 24.41,47.57 24.41,46.97 25.27,46.1 32.58,46.1 32.99,46.51 33.64,46.51 34.8,45.34 v34.8,41.4 | D7.C 17.02,64.64 16.38,65.28 16.38,68.96 16.16,69.17 | R65.2 44.83,19.56 v45.09,19.81 | v34.8,37.72 35.66,36.85 36.33,36.85 36.35,36.88 v44.95,36.88 | 16.16,69.17 10.96,69.17 8,72.14 v1.91,72.14 0.56,73.48 0.56,89.71 v1.65,90.81 | v17.08,69.66 16.6,69.17 16.16,69.17 | v7.88,91.06 6.73,89.92 v6.73,89.66
  Bottom 1.219: D3.C D7.C
5V_SW  (via drill 0.35)
  Top 0.61: 20.17,37.72 TP95.P$1 32.59,37.72 Q10.2 32.57,37.66 v32,38.23 | 16.64,37.72 16,37.08 16,35.43 15.62,35.05 4.57,35.05 4.19,34.67 v4.19,32 | v45.47,5.33 45.36,5.44 v45.36,7.62 | v50.09,11.64 50.09,11.67 50.16,11.75 50.16,17.4 47.24,20.32 v47.24,20.83 47.98,21.57 53.38,21.57 56.18,24.37 56.18,31.88 54.26,33.8 48.09,33.8 45.74,36.15 45.74,37.2 45.62,37.33 v45.62,37.36 | 16.64,37.72 16.66,37.7 | 16.64,37.72 20.17,37.72 | 20.17,37.72 v20.19,37.7
  Bottom 0.305: D13.A 4.67,28.64 R54.2
  Bottom 0.61: C15.1 49.05,5.34 U10.3 45.48,5.34 v45.47,5.33 | R66.2 R67.2 v47.24,20.83 | R56.2 C14.1 48.92,12.58 U9.3 45.73,12.58 45.36,12.21 v45.36,7.62 | R57.2 50.5,12.36 R56.2 | R54.2 3.74,29.57 3.74,31.55 v4.19,32 | R56.2 50.42,11.97 v50.09,11.64 | v32,38.23 34.2,38.23 34.47,38.5 35.21,38.5 36.05,37.66 45.28,37.66 45.58,37.36 v45.62,37.36 | R48.2 15.95,40.14 15.95,40.07 17.5,38.53 19.36,38.53 v20.19,37.7
5V_USB  (via drill 0.35)
  Top 0.305: v13.84,66.8 18.8,66.8 TP109.P$1
  Bottom 0.305: F3.1 13.84,66.93 v13.84,66.8
  Bottom 1.219: F3.1 14.73,64.77 D7.A
BLU_AUTO_DISC  (via drill 0.35)
  Top 0.61: v40.89,57.4 40.89,56.01 | 40.89,56.01 v40.89,52.58 | 40.89,56.01 40.86,55.97 36.93,55.97 36.47,55.51 36.47,55.48 34.77,53.78 34.77,53.19 J4.1
  Bottom 0.305: R73.2 40.26,51.94 v40.89,52.58
  Bottom 0.61: TP52.P$1 46.63,69.19 U18.P$20 46.63,65.43 46.23,65.02 43.05,65.02 40.89,62.87 v40.89,57.4
BLU_CONN_STAT_LED  (via drill 0.35)
  Top 0.305: v42.17,57.4 v42.16,57.4
  Top 0.61: v42.17,52.55 v42.17,57.4
  Bottom 0.305: R68.1 41.53,51.91 v42.17,52.55
  Bottom 0.61: U18.P$21 47.83,63.7 47.12,62.99 47.12,59.66 47.09,59.63 47.09,58.52 45.97,57.4 v42.16,57.4
BLU_FACT_RESET  (via drill 0.35)
  Top 0.61: v47.94,52.59 47.97,52.61 47.97,53.02 49.82,54.87 v49.82,56.62 | v50.29,59.31 v47.88,59.31 47.94,59.24 47.78,59.24 46.9,58.37 37.41,58.37 J1.1
  Bottom 0.305: R70.2 42.8,52.32 43.31,52.84 46.16,52.84 46.71,52.28 47.63,52.28 v47.94,52.59
  Bottom 0.61: TP49.P$1 49.03,69.2 U18.P$22 49.03,63.83 47.88,62.67 v47.88,59.31 | v50.29,59.31 50.29,57.1 v49.82,56.62
BLU_SET_BR  (via drill 0.35)
  Top 0.61: v50.74,61.02 50.7,60.98 48.44,60.98 46.59,59.13 37.1,59.13 34.35,56.39 J2.1
  Bottom 0.305: R71.2 44.07,51.94 44.5,52.38 45.97,52.38 46.52,51.82 48.07,51.82 48.58,52.32 48.58,53.21 47.83,53.96 U18.P$4
  Bottom 0.61: U18.P$4 47.83,58.12 v50.74,61.02 53.72,64.01 TP50.P$1
BLU_SET_BT_MAST  (via drill 0.35)
  Top 0.61: v49.8,63.48 49.76,63.45 45.34,63.45 45.07,63.18 45.07,60.13 44.83,59.89 36.78,59.89 35.82,58.93 J3.1 | v48.77,60.2 48.79,60.22 50.8,60.22 51.31,59.71 51.31,58.68 50.8,58.17 49.03,58.17 48.76,57.91 v48.73,57.91
  Bottom 0.305: R72.2 45.5,51.36 48.7,51.36 49.03,51.7 U18.P$3
  Bottom 0.61: TP51.P$1 51.44,69.01 52.29,68.16 52.29,65.97 v49.8,63.48 48.8,62.48 48.77,62.48 v48.77,60.2 | U18.P$3 49.03,57.6 v48.73,57.91
BLU_TXRX_ACT_LED  (via drill 0.35)
  Top 0.61: v35.56,53.34 35.56,53.49 v37.26,55.19
  Bottom 0.61: R69.1 34.8,52.58 v35.56,53.34 | v37.26,55.19 37.26,55.34 37.95,56.03 37.95,57.37 37.19,58.13 37.19,61.76 36.34,62.6 U18.P$31
BOOT0  (via drill 0.35)
  Top 0.254: U19.P$60 23.46,72.55 22.04,73.97 20.75,73.97 19.3,75.41 18.59,75.41 17.82,76.17 17.82,76.68 18.18,77.03 19.56,77.03 20.09,77.57 20.09,81.05 TP58.P$1 20.67,81.18
  Top 0.305: v19.04,83.99 19.29,83.99 19.35,84.05 19.87,84.05 20.24,83.68 20.24,81.61 TP58.P$1
  Top 0.61: TP58.P$1 21.93,81.41 R90.2
  Bottom 0.305: v19.04,83.99 19.33,84.28 19.33,89.84 21.89,92.4 33.99,92.4 34.58,92.99 38.5,92.99 41.86,89.63 41.86,86.77 38.99,83.9 38.99,82.18 39.8,81.38 39.8,81.1 41.27,79.63 J8.1
BRK_3V3  (via drill 0.35)
  Top 0.254: U19.P$51 24.17,77.05 23.89,77.33 v23.89,77.44
  Top 0.305: v25.78,87 25.96,87.17 31.11,87.17 31.56,86.72 32.48,86.72 33.85,88.09 36.98,88.09 37.33,87.74 37.95,87.74 38.76,88.54 45.12,88.54 45.14,88.52
  Top 0.457: Q1.2 45.15,94.52 R1.1
  Top 0.61: TP5.P$1 45.9,86.69 45.79,86.69 45.14,87.34 45.14,88.52 45.14,93.14 45.15,93.14 Q1.2
  Bottom 0.305: v23.89,77.44 23.89,78.11 25.73,79.96 25.73,86.95 v25.78,87
BRK_12V
  Top 0.254: TP9.P$1 46.1,96.14 Q1.3
  Top 0.457: Q1.3 R2.1 | TP9.P$1 46.23,97.54 46.48,97.79 M11.P$1
COMP_OUT  (via drill 0.35)
  Top 0.61: v19.05,41.66 19.06,41.65 U2.1 TP70.P$1
  Bottom 0.61: v19.05,41.66 18.81,41.89 Q6.1
DCDC5V  (via drill 0.35)
  Top 0.61: v11.18,59.44 11.18,58.29 U3.5 9.27,57.78 8.89,57.4 8.89,44.07 9.23,43.73 R9.2 | TP108.P$1 11.68,58.93 v11.18,59.44 | v11.18,59.44 11.18,61.09 11.64,61.55 C4.PIN_2_+
  Bottom 0.61: v11.18,59.44 11.18,60.07 11.43,60.33 C5.1
  Bottom 1.219: C5.1 14.73,60.33 D3.A
GND  (via drill 0.35)
  Top 0.254: v53.34,50.8 v50.04,50.8 50.04,48.26 v50.16,48.13 | C39.2 39.84,79.67 39.71,79.8 36.37,79.8 35.73,79.17 v35.73,78.61 35.73,77.78 35.97,77.55 U19.P$31 | U19.P$47 27.61,80.97 26.94,81.64 26.94,82.37 C38.2 | U19.P$12 32.61,67.76 v32.13,67.28 | U19.P$63 23.2,71.05 v23.1,70.94
  Top 0.305: D20.A 44.83,14.86 44.58,14.61 44.58,12.06 44.79,11.85 C7.1 | U7.P$15 39.72,25.37 40.01,25.65 | U7.P$16 40.37,26.02 U7.P$45 | U7.P$26 42.32,25.37 U7.P$45 | 41.67,27.32 U7.P$29 48.11,27.32 C22.2 | U7.P$37 42.32,27.97 U7.P$45 | U7.P$38 41.67,27.32 | 41.67,27.32 U7.P$45 | U7.P$39 U7.P$45 | U7.P$1 37.77,29.92 38.42,29.27 | U7.P$2 38.42,29.27 | 38.42,29.27 38.67,29.02 U7.P$45 | U7.P$3 39.07,28.62 U7.P$45 | U7.P$45 U7.P$6 32.38,26.67 TP44.P$1 | U7.P$20 42.97,24.72 U7.P$45 | TP78.P$1 18.03,64.64 9.27,64.64 | U19.P$18 37.87,71.05 38.27,70.65 C40.2
  Top 0.457: C40.2 37.82,69.15 v36.98,69.15 | v22.47,68.33 22.17,68.33 21.76,68.74 C36.2 | M2.5 8.41,63.85 | 8.41,63.85 8.52,63.85 9.24,64.57 18.11,64.57 TP78.P$1 | v9.65,62.61 8.41,63.85
  Top 0.61: M9.P$2 5.46,43.69 6.1,43.05 TP15.P$1 7.49,42.67 v10.67,42.67 12.57,42.67 13.17,43.27 C3.2 | U3.7 13.21,45.38 R10.1 C3.2 | C45.1 R93.2 9.99,62.27 v9.65,62.61 10.52,62.61 11.27,63.36 14.64,63.36 14.91,63.09 14.91,59.85 12.95,57.89 v12.95,49.4 13.21,49.15 U3.7 | U3.7 v15.75,47.62 U3.9 18.29,45.97 18.92,45.34 20.69,45.34 | 20.69,45.34 v23.75,45.34 U1.3 24.72,43.3 R16.1 | 20.69,45.34 U2.4 | C4.PIN_1_- 12.87,68.83 v8.89,68.83 8.34,69.38 R105.1 R14.1 8.34,74.46 7.87,74.93 v4.06,74.93 | U6.2 13,68.71 C4.PIN_1_- | C8.2 13.34,71.12 12.95,70.74 C4.PIN_1_- | R19.1 C7.1 42.33,11.85 42.29,11.81 41.15,11.81 | X2.P$4 27.98,66.04 C35.1 | 30.18,61.59 X2.P$2 32.21,63.08 C44.2 32.55,63.32 v32.55,63.7 | 30.18,61.59 C34.1 | TP110.P$1 5.7,85.45 M7.P$4 2.92,85.45 v2.9,85.47 | C21.1 52.84,29.42 X1.P$2 51.47,29.79 52.35,30.66 52.35,31.31 51.78,31.88 47.85,31.88 44.17,35.56 v44.17,38.45 44.17,40.54 | X1.P$4 48.51,27.22 C22.2 | Q8.8 Q8.7 Q8.6 | Q8.5 Q8.6 | 41.15,13.97 41.15,17.78 40.01,18.92 40.01,25.65 | 39.88,25.53 40.01,25.65 | 40.01,25.65 U7.P$45 42.02,27.67 Q8.8 | C6.2 41.19,14.01 41.15,13.97 | TP44.P$1 31.24,23.62 C19.1 29.98,23.5 29.59,23.11 29.59,19.3 | C20.1 38.65,29 38.67,29.02 | 29.59,19.3 29.59,19.05 | 29.59,19.05 29.59,17.65 30.99,16.26 J7.P$1 | D4.- 40.93,9.31 41.15,9.53 v41.15,10.29 41.15,11.81 | 41.15,11.81 41.15,13.97 | 29.61,19.07 29.59,19.05 | M10.5 M10.4 27.82,21.44 v27.84,21.46 | 13.21,43.78 C3.2 | Q8.8 39.12,38.61 38.61,39.12 38.61,45.85 38.1,46.35 37.68,46.35 | C23.2 v33.31,45.72 33.31,46.01 33.66,46.35 37.68,46.35 | v43.74,17.66 43.88,17.52 44.48,17.52 45.77,16.23 45.77,14.91 45.72,14.86 D20.A
  Top 0.61: 29.59,19.3 29.73,19.44 32.2,19.44 32.47,19.71 32.47,20.95 34.63,20.95 v35.01,21.34 | v38.61,5.97 36.32,3.68 v35.31,3.68 | v20.55,10.03 v22.23,10.03 | X2.P$4 27.09,64.68 26.67,64.26 26.67,61.21 27.56,60.33 29.59,60.33 30.18,60.92 | 30.18,60.92 30.18,61.59 | 44.17,40.54 43.56,41.15 Q8.6 | 44.17,40.54 44.48,40.54 v45.47,41.53 45.34,41.66 v45.34,45.72 v45.34,49.15 | v42.97,49.28 42.97,55.86 v42.95,55.88 | C37.2 C39.2 40.98,77.85 v47.88,77.85 | 37.68,46.35 C33.1 | R101.1 55.09,59.14 v55.13,59.18 | R102.1 55.09,64.56 v55.13,64.52 | M6.P$2 14.1,98.68 14.35,98.93 | 30.61,98.93 28.7,98.93 28.45,98.68 24.64,98.68 24.38,98.93 22.35,98.93 | 30.61,98.93 32.51,98.93 32.77,98.68 36.7,98.68 36.96,98.93 38.86,98.93 M3.P$2 | 14.35,98.93 16,98.93 16.26,98.68 20.07,98.68 20.32,98.93 22.35,98.93 | M5.P$2 22.35,98.93 | M4.P$2 30.61,98.93 | 14.35,98.93 12.19,98.93 11.98,98.72 10.92,98.72 9.96,97.75 9.96,96.52 8.31,94.87 TP111.P$1 5.7,94.85 M8.P$4 2.24,94.85 v2.14,94.74 | C43.2 C42.2 37.05,64.73 v37.21,64.9 | S1.P$2 27.87,49.31 27.87,48.76 27.48,48.38 27.48,45.39 v27.56,45.32 | S1.P$1 28.96,56.8 28.96,59.51 30.18,60.73 30.18,60.92 | X2.P$4 27.93,64.73 C41.2 25.53,67.82 25.02,68.33 v22.47,68.33 | v3.23,78.87 3.61,79.25 12.35,79.25 12.38,79.22 13.52,79.22 v13.59,79.16 | v24.03,84.18 24.05,84.15 25.2,84.15 25.47,83.89 25.47,83.84 C38.2 26.19,83.17 33.34,83.17 v35.1,84.93 | v22.46,84.09 21.97,83.61 R90.1 20.08,85.04 18.98,85.04 18.26,84.31 18.26,83.67 18.9,83.02 18.9,79.8 18.13,79.03 15.78,79.03 v14.48,77.72 14.48,77.09 TP113.P$1 | J5.3 TP112.P$1 | TP54.P$1 11.81,5.08 v11.81,5.21 | v6.39,54.85 5.74,54.2 5.74,53.74 5.28,53.28 5.26,53.28 v5.2,53.22
  Bottom 0.254: U17.P$2 U17.P$3 | U17.P$2 51.3,36.45 51.44,36.32 U17.P$12 | U16.P$7 U16.P$6 U16.P$5 | C29.2 C28.2 C26.1 50.63,40.42 50.4,40.66 50.4,41.8 50.14,42.06 U16.P$19 48.79,42.06 48.5,41.77 U16.P$20 U16.P$21 U16.P$22 U16.P$23 U16.P$24 46.5,41.89 46.33,42.06 U16.P$1 45.4,41.6 v45.47,41.53 | U15.P$15 U15.P$16 | 49.12,50.16 C24.2 49.5,49.78 U15.P$16 | TP35.P$1 43.08,45.06 U16.P$7 | U15.P$5 52.84,50.8 v53.34,50.8 | v50.04,50.8 50.32,50.52 U15.P$16 | U15.P$10 52.32,47.24 52.07,46.99 | 52.07,46.99 51.56,46.99 51.32,47.24 U15.P$12 U15.P$13 50.52,47.78 v50.16,48.13 | C27.1 53.34,44.36 53.34,46.74 53.09,46.99 52.07,46.99 | U16.P$7 45.4,45.66 v45.34,45.72 45.85,45.72 45.97,45.85 45.97,46.61 46.1,46.74 46.86,46.74 47,46.6 U16.P$9 U16.P$10 47.5,44.58 47.51,44.56 U16.P$14 | C31.1 47.75,37.08 48.38,36.45 U17.P$2
  Bottom 0.305: D12.C 11.17,22.93 Q16.2 | D10.A 7.94,41.71 7.87,41.65 | D8.3 43.94,14.48 44.58,13.84 | U9.2 | U10.2 | 44.58,13.84 44.58,13.21 | 45.21,13.84 44.58,13.84 | v13.21,36.45 12.43,37.23 10.87,37.23 10.69,37.41 10.69,38.27 10.87,38.45 11.76,38.45 11.77,38.46 13.18,38.46 13.34,38.61 13.33,38.61 13.48,38.61
  Bottom 0.457: D9.3 v38.61,5.97 | U18.P$28 34.69,63.9 34.35,63.56 34.35,58.1 34.75,57.7 U18.P$29 | TP35.P$1 39.16,46.23 35.56,49.84 31.83,49.84 J4.2 | U18.SHEILD2 35.52,65.79 32.89,65.79 32.13,66.55 v32.13,67.28 | v36.98,69.15 36.92,69.22 TP53.P$1 | v23.1,70.94 22.4,70.24 22.4,70.16 22.38,70.13 22.38,69.09 22.47,68.99 v22.47,68.33
  Bottom 0.61: 9.78,61.47 9.56,61.68 C1.2 8.44,61.99 15.94,61.99 16.2,61.72 16.2,59.18 13.65,56.63 11.48,56.63 9.69,54.83 6.86,54.83 | 9.78,61.47 C5.2 | 9.78,61.47 9.78,62.49 v9.65,62.61 8.64,63.63 8.64,68.58 v8.89,68.83 | C2.2 18.81,51.96 Q6.2 18.24,51.31 D1.A v15.75,47.62 | v12.95,49.4 12.7,49.66 7.37,49.66 6.73,50.29 Q5.5 6.21,51.57 6.16,51.57 5.2,52.53 v5.2,53.22 4.55,52.57 S4.COM | C18.1 v13.21,36.45 12.83,36.07 R43.1 12.68,35.04 Q15.2 10.11,34.04 9.53,34.04 9.14,33.66 9.14,30.73 8.87,30.46 Q18.2 8.06,26.1 7.87,25.91 5.46,25.91 5.08,25.53 5.08,23.37 5.42,23.03 R52.1 6.32,22.93 Q16.2 | C15.2 49.07,6.61 U10.2 45.2,6.61 44.58,7.24 44.58,10.29 | U9.2 48.94,13.85 C14.2 | U11.8 35.87,19.29 Q27.2 35.01,19.52 R104.1 v35.01,21.34 35.01,21.97 C16.1 | C31.1 C32.1 45.67,38.45 v44.17,38.45 | U14.4 7.87,41.65 9.77,41.65 10.67,42.55 | 10.67,42.55 10.74,42.61 15.3,42.61 15.71,42.2 R49.1 16.14,41.66 16.72,41.08 16.72,41.07 17.14,40.64 17.14,39.96 17.81,39.29 21.95,39.29 23.52,37.72 23.52,36.07 20.64,36.07 19.49,37.21 17.21,37.21 15.81,38.61 13.48,38.61 | R26.1 C12.1 C13.1 | 44.58,10.29 44.58,13.21 45.21,13.84 U9.2 | 30.39,10.03 v30.39,11.56 R26.1 | 30.39,10.03 C11.1 C10.1 R25.1 30.39,4.03 30.73,3.68 v35.31,3.68 | Q14.2 9.84,14.67 10.29,14.22 15.67,14.22 Q13.2 16.56,14.22 20.07,14.22 20.45,13.84 20.45,10.67 19.81,10.03 | 19.81,10.03 14.73,10.03 14.23,9.54 U12.4 14.23,6.23 13.55,5.55 R38.1 12.15,5.55 v11.81,5.21 | 44.58,18.12 C17.2 43.78,17.66 v43.74,17.66 | 44.58,10.29 44.12,10.29 44.12,10.28 43.47,10.28 43.46,10.29 v41.15,10.29 | R26.1 29.91,13.06 29.01,13.06 28.32,13.75 28.32,20.98 v27.84,21.46